# EAGLE board Mega Breakout with more GNDs_final (EAGLE 9.6.2)
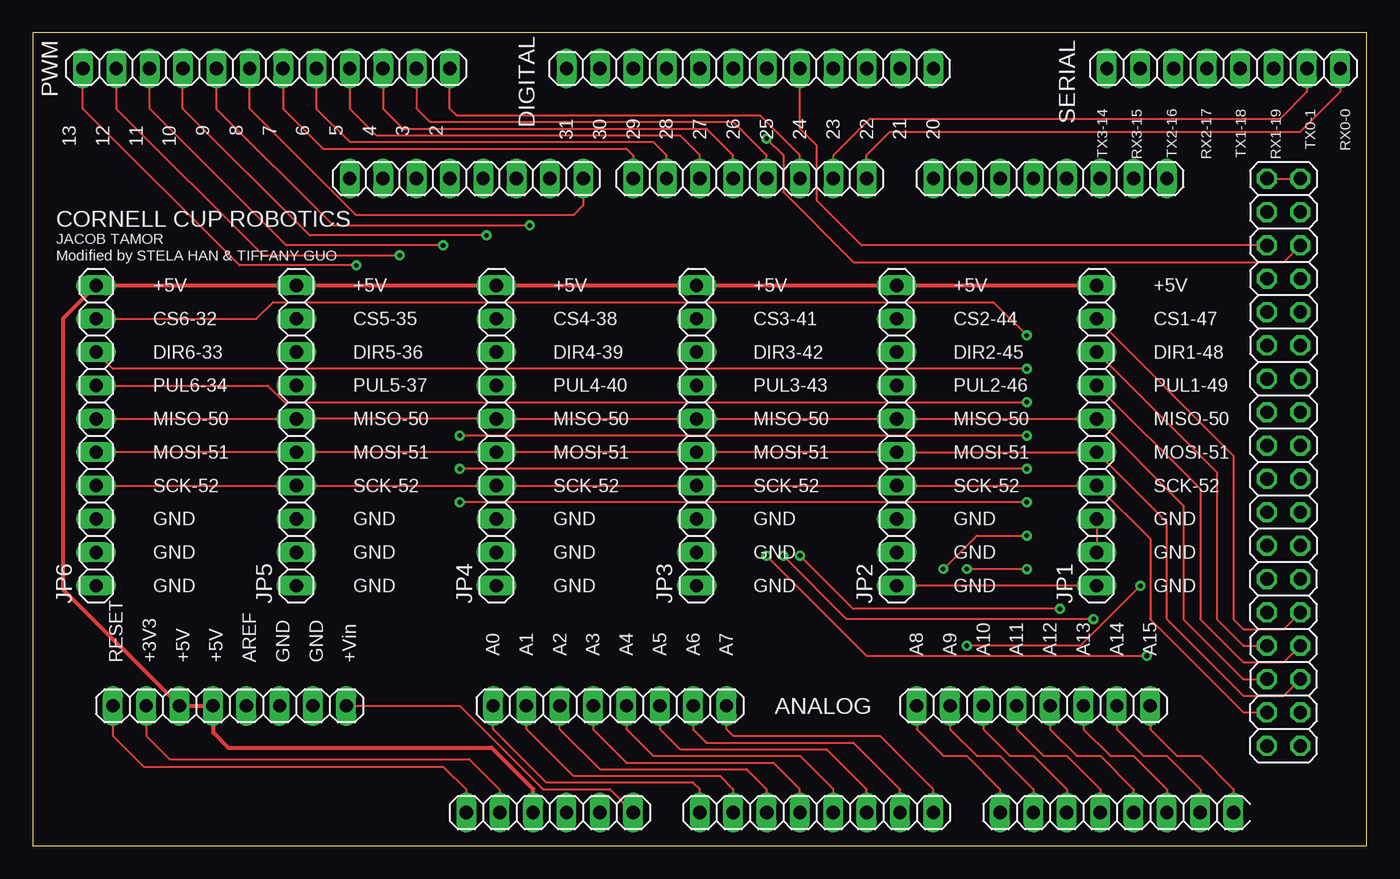
[diagram p0: board, top side]
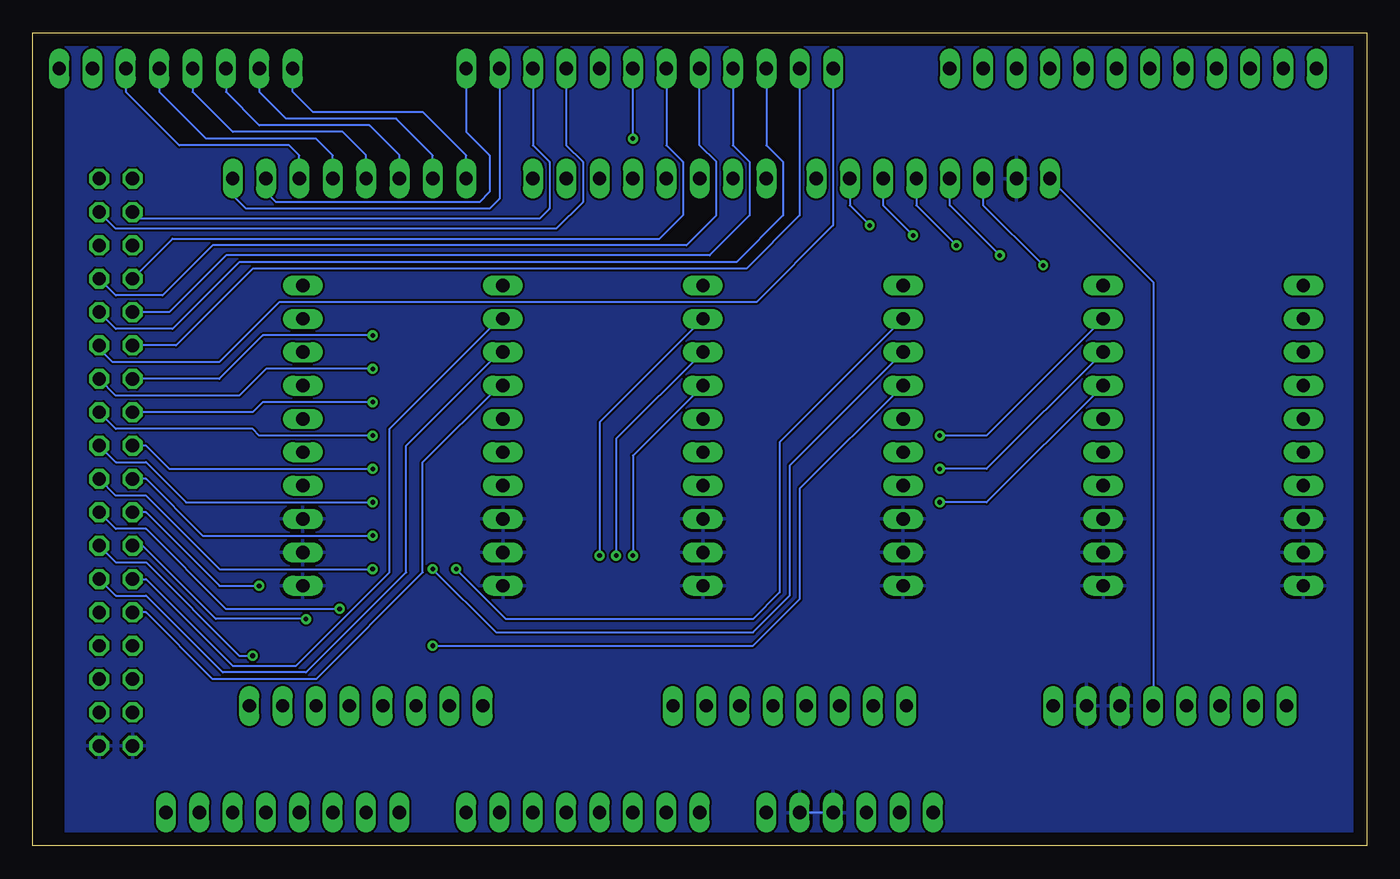
[diagram p1: board, bottom side, seen from below]

Size 101.58 x 61.9 mm. Coordinates in mm from the lower left corner, seen from the top.
Outline: 0,0 101.58,0 101.58,61.9 0,61.9 0,0
Copper layers (1*16): Top 0.035mm / dielectric 1.5mm / Bottom 0.035mm
Design rules "default": minimum track width 6mil, minimum drill 0.35mm, track to track 6mil, track to pad 6mil, pad to pad 6mil, via to via 6mil, smd to smd 6mil, copper to edge 40mil, drill to drill 6mil, minimum pad ring 10mil, minimum via ring 8mil, stop-mask expansion 4mil, vias tented up to drill 0mil, thermal gap 10mil

## Footprints (pad centres in the part's own frame; a part is rotated, then mirrored left to right if it is on the bottom)
1X08 = drill 1.016 long: 1 -8.89,0; 2 -6.35,0; 3 -3.81,0; 4 -1.27,0; 5 1.27,0; 6 3.81,0; 7 6.35,0; 8 8.89,0
1X12 = drill 1.016 long: 1 -13.97,0; 2 -11.43,0; 3 -8.89,0; 4 -6.35,0; 5 -3.81,0; 6 -1.27,0; 7 1.27,0; 8 3.81,0; 9 6.35,0; 10 8.89,0; 11 11.43,0; 12 13.97,0
MEGA_ARDUINO = drill 1.016 long: 1 33.02,2.54; 2 35.56,2.54; 3 38.1,2.54; 4 40.64,2.54; 5 43.18,2.54; 6 45.72,2.54; 7 50.8,2.54; 8 53.34,2.54; 9 55.88,2.54; 10 58.42,2.54; 11 60.96,2.54; 12 63.5,2.54; 13 66.04,2.54; 14 68.58,2.54; 15 73.66,2.54; 16 76.2,2.54; 17 78.74,2.54; 18 81.28,2.54; 19 83.82,2.54; 20 86.36,2.54; 21 88.9,2.54; 22 91.44,2.54; 23 86.36,50.8; 24 83.82,50.8; 25 81.28,50.8; 26 78.74,50.8; 27 76.2,50.8; 28 73.66,50.8; 29 71.12,50.8; 30 68.58,50.8; 31 63.5,50.8; 32 60.96,50.8; 33 58.42,50.8; 34 55.88,50.8; 35 53.34,50.8; 36 50.8,50.8; 37 48.26,50.8; 38 45.72,50.8; 39 41.91,50.8; 40 39.37,50.8; 41 36.83,50.8; 42 34.29,50.8; 43 31.75,50.8; 44 29.21,50.8; 45 26.67,50.8; 46 24.13,50.8 | drill 1.016 octagon: 47 93.98,50.8; 48 96.52,50.8; 49 93.98,48.26; 50 96.52,48.26; 51 93.98,45.72; 52 96.52,45.72; 53 93.98,43.18; 54 96.52,43.18; 55 93.98,40.64; 56 96.52,40.64; 57 93.98,38.1; 58 96.52,38.1; 59 93.98,35.56; 60 96.52,35.56; 61 93.98,33.02; 62 96.52,33.02; 63 93.98,30.48; 64 96.52,30.48; 65 93.98,27.94; 66 96.52,27.94; 67 93.98,25.4; 68 96.52,25.4; 69 93.98,22.86; 70 96.52,22.86; 71 93.98,20.32; 72 96.52,20.32; 73 93.98,17.78; 74 96.52,17.78; 75 93.98,15.24; 76 96.52,15.24; 77 93.98,12.7; 78 96.52,12.7; 79 93.98,10.16; 80 96.52,10.16; 81 93.98,7.62; 82 96.52,7.62
1X10 = drill 1.016 long: 1 -11.43,0; 2 -8.89,0; 3 -6.35,0; 4 -3.81,0; 5 -1.27,0; 6 1.27,0; 7 3.81,0; 8 6.35,0; 9 8.89,0; 10 11.43,0

## Placement (x,y rotation side)
ANALOG  [1X08]  76.2,10.67 0 top
ANALOG1  [1X08]  43.94,10.67 0 top
DIGITAL  [1X12]  54.61,59.18 180 top
IC1  [MEGA_ARDUINO]  0,0 0 top
JP1  [1X10]  81.03,31.24 90 top
JP2  [1X10]  65.79,31.24 90 top
JP3  [1X10]  50.55,31.24 90 top
JP4  [1X10]  35.31,31.24 90 top
JP5  [1X10]  20.07,31.24 90 top
JP6  [1X10]  4.83,31.24 90 top
POWER  [1X08]  14.99,10.67 0 top
PWM  [1X12]  17.78,59.18 180 top
SERIAL  [1X08]  90.68,59.18 0 top

## Library data of the parts
ANALOG ANALOG1 DIGITAL JP1-JP6 POWER PWM SERIAL = pinhead
IC1 = arduino

## Nets
2: IC1.33 PWM.1
3: IC1.34 PWM.2
4: IC1.35 PWM.3
5: IC1.36 PWM.4
6: IC1.37 PWM.5
7: IC1.38 PWM.6
8: IC1.39 PWM.7
9: IC1.40 PWM.8
10: IC1.41 PWM.9
11: IC1.42 PWM.10
12: IC1.43 PWM.11
13: IC1.44 PWM.12
20: DIGITAL.1 IC1.24
21: DIGITAL.2 IC1.23
22: DIGITAL.3 IC1.49
23: DIGITAL.4 IC1.50
24: DIGITAL.5 IC1.51
25: DIGITAL.6 IC1.52
26: DIGITAL.7 IC1.53
27: DIGITAL.8 IC1.54
28: DIGITAL.9 IC1.55
29: DIGITAL.10 IC1.56
30: DIGITAL.11 IC1.57
31: DIGITAL.12 IC1.58
+3V3: IC1.2 POWER.2
+5V: IC1.3 JP1.10 JP2.10 JP3.10 JP4.10 JP5.10 JP6.10 POWER.3 POWER.4
+VIN: IC1.6 POWER.8
A0: ANALOG1.1 IC1.7
A1: ANALOG1.2 IC1.8
A2: ANALOG1.3 IC1.9
A3: ANALOG1.4 IC1.10
A4: ANALOG1.5 IC1.11
A5: ANALOG1.6 IC1.12
A6: ANALOG1.7 IC1.13
A7: ANALOG1.8 IC1.14
A8: ANALOG.1 IC1.15
A9: ANALOG.2 IC1.16
A10: ANALOG.3 IC1.17
A11: ANALOG.4 IC1.18
A12: ANALOG.5 IC1.19
A13: ANALOG.6 IC1.20
A14: ANALOG.7 IC1.21
A15: ANALOG.8 IC1.22
AREF: IC1.46 POWER.5
CS1-47: IC1.74 JP1.9
CS2-44: IC1.71 JP2.9
CS3-41: IC1.68 JP3.9
CS4-38: IC1.65 JP4.9
CS5-35: IC1.62 JP5.9
CS6-32: IC1.59 JP6.9
DIR1-48: IC1.75 JP1.8
DIR2-45: IC1.72 JP2.8
DIR3-42: IC1.69 JP3.8
DIR4-39: IC1.66 JP4.8
DIR5-36: IC1.63 JP5.8
DIR6-33: IC1.60 JP6.8
GND: IC1.4 IC1.5 IC1.45 IC1.81 IC1.82 JP1.1 JP1.2 JP1.3 JP2.1 JP2.2 JP2.3 JP3.1 JP3.2 JP3.3 JP4.1 JP4.2 JP4.3 JP5.1 JP5.2 JP5.3 JP6.1 JP6.2 JP6.3 POWER.6 POWER.7
MISO-50: IC1.77 JP1.6 JP2.6 JP3.6 JP4.6 JP5.6 JP6.6
MOSI-51: IC1.78 JP1.5 JP2.5 JP3.5 JP4.5 JP5.5 JP6.5
N$1: IC1.47 IC1.48
PUL1-49: IC1.76 JP1.7
PUL2-46: IC1.73 JP2.7
PUL3-43: IC1.70 JP3.7
PUL4-40: IC1.67 JP4.7
PUL5-37: IC1.64 JP5.7
PUL6-34: IC1.61 JP6.7
RESET: IC1.1 POWER.1
RX0-0: IC1.31 SERIAL.8
RX1-19: IC1.25 SERIAL.6
RX2-17: IC1.27 SERIAL.4
RX3-15: IC1.29 SERIAL.2
SCK-52: IC1.79 JP1.4 JP2.4 JP3.4 JP4.4 JP5.4 JP6.4
TX0-1: IC1.32 SERIAL.7
TX1-18: IC1.26 SERIAL.5
TX2-16: IC1.28 SERIAL.3
TX3-14: IC1.30 SERIAL.1

## Tracks (layer width: path | path; a pad name or v marks a point on that pad's centre or on a via)
2
  Top 0.152: PWM.1 31.75,56.13 32.26,55.63 55.37,55.63 58.42,52.58 IC1.33
3
  Top 0.152: PWM.2 29.21,56.13 30.23,55.12 53.34,55.12 55.88,52.58 IC1.34
4
  Top 0.152: PWM.3 26.67,56.13 28.19,54.61 51.31,54.61 53.34,52.58 IC1.35
5
  Top 0.152: PWM.4 24.13,56.13 26.16,54.1 49.28,54.1 50.8,52.58 IC1.36
6
  Top 0.152: PWM.5 21.59,56.13 24.13,53.59 47.24,53.59 48.26,52.58 IC1.37
7
  Top 0.152: PWM.6 19.05,56.13 22.1,53.09 45.21,53.09 45.72,52.58 IC1.38
8
  Top 0.152: IC1.39 41.91,48.77 41.17,48.03 24.61,48.03 16.51,56.13 PWM.7
9  (via drill 0.35)
  Top 0.152: PWM.8 13.97,56.13 22.86,47.24 v37.85,47.24
  Bottom 0.152: IC1.40 39.37,48.77 v37.85,47.24
10  (via drill 0.35)
  Top 0.152: v34.54,46.48 21.08,46.48 11.43,56.13 PWM.9
  Bottom 0.152: IC1.41 36.83,48.77 v34.54,46.48
11  (via drill 0.35)
  Top 0.152: v31.24,45.72 19.3,45.72 8.89,56.13 PWM.10
  Bottom 0.152: IC1.42 34.29,48.77 v31.24,45.72
12  (via drill 0.35)
  Top 0.152: PWM.11 6.35,56.13 17.53,44.96 v27.94,44.96
  Bottom 0.152: IC1.43 31.75,48.77 v27.94,44.96
13  (via drill 0.35)
  Top 0.152: v24.64,44.2 15.75,44.2 3.81,56.13 PWM.12
  Bottom 0.152: IC1.44 29.21,48.77 v24.64,44.2
20
  Bottom 0.152: IC1.24 83.82,49.78 83.06,49.02 67.56,49.02 66.8,49.78 66.8,52.58 68.58,54.36 DIGITAL.1
21
  Bottom 0.152: IC1.23 86.36,49.53 85.34,48.51 66.8,48.51 66.04,49.28 DIGITAL.2
22
  Bottom 0.152: DIGITAL.3 63.5,53.34 62.23,52.07 62.23,48.51 62.99,47.75 93.47,47.75 IC1.49
23
  Bottom 0.152: DIGITAL.4 60.96,53.34 59.69,52.07 59.69,49.02 61.72,46.99 95.25,46.99 IC1.50
24
  Top 0.152: IC1.51 63.12,45.72 59.71,49.12 59.71,53.31 58.42,54.61 DIGITAL.5
25  (via drill 0.35)
  Top 0.152: IC1.52 95.25,44.45 62.48,44.45 57.15,49.78 57.15,52.58 v55.88,53.85
  Bottom 0.152: v55.88,53.85 DIGITAL.6
26
  Bottom 0.152: DIGITAL.7 53.34,53.34 52.07,52.07 52.07,48.01 53.85,46.23 90.93,46.23 IC1.53
27
  Bottom 0.152: IC1.54 95.25,41.91 91.69,41.91 87.88,45.72 51.82,45.72 49.53,48.01 49.53,52.07 50.8,53.34 DIGITAL.8
28
  Bottom 0.152: DIGITAL.9 48.26,53.34 46.99,52.07 46.99,48.01 50.04,44.96 86.87,44.96 91.19,40.64 IC1.55
29
  Bottom 0.152: DIGITAL.10 45.72,53.34 44.45,52.07 44.45,48.01 48.01,44.45 85.85,44.45 90.93,39.37 95.25,39.37 IC1.56
30
  Bottom 0.152: DIGITAL.11 43.18,48.01 47.24,43.94 84.84,43.94 90.68,38.1 IC1.57
31
  Bottom 0.152: IC1.58 96.52,37.85 95.5,36.83 87.38,36.83 82.8,41.4 46.48,41.4 40.64,47.24 DIGITAL.12
+3V3
  Top 0.152: POWER.2 8.64,8.38 10.41,6.6 33.23,6.6 35.56,4.27 IC1.2
+5V
  Top 0.305: IC1.3 38.1,4.32 34.92,7.49 14.86,7.49 13.72,8.64 POWER.4 POWER.3 2.29,19.56 2.29,40.13 JP6.10 JP5.10 JP4.10 JP3.10 JP2.10 JP1.10
+VIN
  Top 0.152: POWER.8 32.51,10.67 38.86,4.32 43.94,4.32 IC1.6
A0
  Top 0.152: ANALOG1.1 35.05,8.89 39.12,4.83 50.29,4.83 50.8,4.32 IC1.7
A1
  Top 0.152: ANALOG1.2 37.59,8.89 41.15,5.33 52.32,5.33 53.34,4.32 IC1.8
A2
  Top 0.152: ANALOG1.3 40.13,8.89 43.18,5.84 54.36,5.84 55.88,4.32 IC1.9
A3
  Top 0.152: ANALOG1.4 42.67,8.89 45.21,6.35 56.39,6.35 58.42,4.32 IC1.10
A4
  Top 0.152: ANALOG1.5 45.21,8.89 47.24,6.86 58.42,6.86 60.96,4.32 IC1.11
A5
  Top 0.152: ANALOG1.6 47.75,8.89 49.28,7.37 60.45,7.37 63.5,4.32 IC1.12
A6
  Top 0.152: ANALOG1.7 50.29,8.89 51.31,7.87 62.48,7.87 66.04,4.32 IC1.13
A7
  Top 0.152: ANALOG1.8 52.83,8.89 53.34,8.38 64.52,8.38 68.58,4.32 IC1.14
A8
  Top 0.152: ANALOG.1 67.31,8.89 69.34,6.86 71.12,6.86 73.66,4.32 IC1.15
A9
  Top 0.152: ANALOG.2 69.85,8.89 71.88,6.86 73.66,6.86 76.2,4.32 IC1.16
A10
  Top 0.152: ANALOG.3 72.39,8.89 74.42,6.86 76.2,6.86 78.74,4.32 IC1.17
A11
  Top 0.152: ANALOG.4 74.93,8.89 76.96,6.86 78.74,6.86 81.28,4.32 IC1.18
A12
  Top 0.152: ANALOG.5 77.47,8.89 79.5,6.86 81.28,6.86 83.82,4.32 IC1.19
A13
  Top 0.152: ANALOG.6 80.01,8.89 82.04,6.86 83.82,6.86 86.36,4.32 IC1.20
A14
  Top 0.152: ANALOG.7 82.55,8.89 84.58,6.86 86.36,6.86 88.9,4.32 IC1.21
A15
  Top 0.152: ANALOG.8 85.09,8.89 87.12,6.86 88.9,6.86 91.44,4.32 IC1.22
AREF
  Bottom 0.152: IC1.46 16.26,42.93 POWER.5
CS1-47
  Top 0.152: IC1.74 95.25,16.51 92.2,16.51 91.44,17.27 91.44,29.72 JP1.9
CS2-44
  Bottom 0.152: IC1.71 92.96,20.32 86.36,13.72 81.53,13.72 74.42,20.83 74.42,31.75 66.04,40.13 JP2.9
CS3-41  (via drill 0.35)
  Top 0.152: v58.42,22.1 62.47,18.05 v78.22,18.05
  Bottom 0.152: JP3.9 58.42,32.26 v58.42,22.1 | v78.22,18.05 86.88,18.05 92.96,24.13 95.25,24.13 IC1.68
CS4-38  (via drill 0.35)
  Top 0.152: v69.34,21.08 71.88,23.62 v75.69,23.62
  Bottom 0.152: IC1.65 92.96,27.94 88.65,23.62 v75.69,23.62 | JP4.9 44.7,30.73 44.7,19.3 46.74,17.27 65.53,17.27 v69.34,21.08
CS5-35  (via drill 0.35)
  Top 0.152: v75.69,31.24 v32.51,31.24
  Bottom 0.152: JP5.9 28.96,31.24 v32.51,31.24 | IC1.62 95.25,31.75 84.84,31.75 84.33,31.24 v75.69,31.24
CS6-32  (via drill 0.35)
  Top 0.152: JP6.9 17.02,40.13 18.29,41.4 73.15,41.4 v75.69,38.86
  Bottom 0.152: IC1.59 87.38,35.56 84.07,38.86 v75.69,38.86
DIR1-48
  Top 0.152: IC1.75 92.2,15.24 90.17,17.27 90.17,26.42 90.17,26.67 90.17,28.45 JP1.8
DIR2-45
  Bottom 0.152: IC1.72 95.25,19.05 92.96,19.05 87.12,13.21 80.77,13.21 73.15,20.83 73.15,30.48 66.04,37.59 JP2.8
DIR3-42  (via drill 0.35)
  Top 0.152: v80.77,17.27 61.98,17.27 v57.15,22.1
  Bottom 0.152: IC1.69 93.22,22.86 87.64,17.28 v80.78,17.28 v80.77,17.27 | JP3.8 57.15,30.99 v57.15,22.1
DIR4-39  (via drill 0.35)
  Top 0.152: v75.7,21.07 75.69,21.08 v71.12,21.08
  Bottom 0.152: JP4.8 43.94,28.96 43.94,19.05 46.74,16.26 66.29,16.26 v71.12,21.08 | IC1.66 95.25,26.67 92.96,26.67 87.33,21.03 75.74,21.03 v75.7,21.07
DIR5-36  (via drill 0.35)
  Top 0.152: v75.69,28.7 v32.51,28.7
  Bottom 0.152: JP5.8 28.96,28.7 v32.51,28.7 | v75.69,28.7 91.19,28.7 92.96,30.48 IC1.63
DIR6-33  (via drill 0.35)
  Top 0.152: v75.69,36.32 6.1,36.32 JP6.8
  Bottom 0.152: IC1.60 95.25,34.29 85.85,34.29 83.82,36.32 v75.69,36.32
GND
  Top 0.152: JP1.3 JP1.2 | JP1.1 JP2.1
  Bottom 0.152: IC1.4 IC1.5
  pour Bottom: 0.76,61.72 0.76,0 99.06,0 99.06,61.72
MISO-50
  Top 0.152: IC1.77 92.2,12.7 87.63,17.27 87.63,25.91 JP1.6 JP2.6 JP3.6 JP4.6 JP5.6 JP6.6
MOSI-51
  Top 0.152: IC1.78 95.25,11.43 92.2,11.43 86.36,17.27 86.36,24.64 81.15,29.84 JP1.5 JP2.5 JP3.5 JP4.5 JP5.5 JP6.5
N$1
  Top 0.152: IC1.47 IC1.48
PUL1-49
  Top 0.152: IC1.76 95.25,13.97 92.2,13.97 88.9,17.27 88.9,25.15 88.9,25.4 88.9,27.18 JP1.7
PUL2-46
  Bottom 0.152: IC1.73 92.96,17.78 87.88,12.7 80.01,12.7 71.88,20.83 71.88,29.21 66.04,35.05 JP2.7
PUL3-43  (via drill 0.35)
  Top 0.152: v55.88,22.1 63.5,14.48 v84.84,14.48
  Bottom 0.152: IC1.70 95.25,21.59 92.96,21.59 85.85,14.48 v84.84,14.48 | JP3.7 55.88,29.72 v55.88,22.1
PUL4-40  (via drill 0.35)
  Top 0.152: v84.34,19.8 79.79,15.24 v71.12,15.24
  Bottom 0.152: JP4.7 43.18,27.18 43.18,18.8 46.74,15.24 v71.12,15.24 | IC1.67 92.96,25.4 87.36,19.8 v84.34,19.8
PUL5-37  (via drill 0.35)
  Top 0.152: v75.69,26.16 v32.51,26.16
  Bottom 0.152: IC1.64 95.25,29.21 92.96,29.21 89.92,26.16 v75.69,26.16 | JP5.7 28.96,26.16 v32.51,26.16
PUL6-34  (via drill 0.35)
  Top 0.152: JP6.7 17.9,35.05 19.17,33.78 v75.69,33.78
  Bottom 0.152: IC1.61 84.84,33.02 84.07,33.78 v75.69,33.78
RESET
  Top 0.152: IC1.1 33.02,4.27 31.24,6.04 8.43,6.04 6.1,8.38 POWER.1
RX0-0
  Top 0.152: IC1.31 63.5,52.58 65.28,54.36 96.52,54.36 99.57,57.4 SERIAL.8
RX1-19
  Bottom 0.152: IC1.25 81.28,52.58 82.04,53.34 90.42,53.34 94.49,57.4 SERIAL.6
RX2-17
  Bottom 0.152: IC1.27 76.2,52.58 77.98,54.36 86.36,54.36 89.41,57.4 SERIAL.4
RX3-15
  Bottom 0.152: SERIAL.2 84.33,57.4 82.3,55.37 73.91,55.37 71.12,52.58 IC1.29
SCK-52
  Top 0.152: IC1.79 92.2,10.16 85.09,17.27 85.09,23.37 JP1.4 JP2.4 JP3.4 JP4.4 20.32,27.43 JP5.4 JP6.4
TX0-1
  Top 0.152: IC1.32 60.96,52.58 63.75,55.37 95,55.37 97.03,57.4 SERIAL.7
TX1-18
  Bottom 0.152: IC1.26 78.74,52.58 80.01,53.85 88.39,53.85 91.95,57.4 SERIAL.5
TX2-16
  Bottom 0.152: IC1.28 73.66,52.58 75.95,54.86 84.33,54.86 86.87,57.4 SERIAL.3
TX3-14
  Bottom 0.152: IC1.30 68.58,52.58 71.88,55.88 80.26,55.88 81.79,57.4 SERIAL.1

## Text on the board
tPlace: PWM | DIGITAL | SERIAL | TX3-14 / RX3-15 / TX2-16 / RX2-17 / TX1-18 / RX1-19 / TX0-1 / RX0-0 | 13 / 12 / 11 / 10 / 9 / 8 / 7 / 6 / 5 / 4 / 3 / 2 | 31 / 30 / 29 / 28 / 27 / 26 / 25 / 24 / 23 / 22 / 21 / 20 | CORNELL CUP ROBOTICS | JACOB TAMOR | Modified by STELA HAN & TIFFANY GUO | +5V / CS6-32 / DIR6-33 / PUL6-34 / MISO-50 / MOSI-51 / SCK-52 / GND / GND / GND | +5V / CS5-35 / DIR5-36 / PUL5-37 / MISO-50 / MOSI-51 / SCK-52 / GND / GND / GND | +5V / CS4-38 / DIR4-39 / PUL4-40 / MISO-50 / MOSI-51 / SCK-52 / GND / GND / GND | +5V / CS3-41 / DIR3-42 / PUL3-43 / MISO-50 / MOSI-51 / SCK-52 / GND / GND / GND | +5V / CS2-44 / DIR2-45 / PUL2-46 / MISO-50 / MOSI-51 / SCK-52 / GND / GND / GND | +5V / CS1-47 / DIR1-48 / PUL1-49 / MISO-50 / MOSI-51 / SCK-52 / GND / GND / GND | RESET / +3V3 / +5V / +5V / AREF / GND / GND / +Vin | A0 / A1 / A2 / A3 / A4 / A5 / A6 / A7 | A8 / A9 / A10 / A11 / A12 / A13 / A14 / A15 | ANALOG